# EAGLE board medi_dense_11_cpx (EAGLE 6.0)

Size 72.64 x 66.04 mm. Coordinates in mm from the lower left corner, seen from the top.
Outline: 0,0 0,66.04 72.64,66.04 72.64,0 0,0
Copper layers (1*16): Top 0.035mm / dielectric 1.5mm / Bottom 0.035mm
Design rules: minimum track width 10mil, minimum drill 24mil, track to track 8mil, track to pad 8mil, pad to pad 8mil, via to via 8mil, smd to smd 8mil, copper to edge 40mil, drill to drill 8mil, minimum pad ring 10mil, minimum via ring 8mil, stop-mask expansion 4mil, vias tented up to drill 0mil, thermal gap 10mil
Holes 3.2 mm at 6.6,6.6 6.6,59.44 66.04,6.6 66.04,59.44

## Footprints (pad centres in the part's own frame; a part is rotated, then mirrored left to right if it is on the bottom)
LED5MM = drill 0.813 octagon: A -1.27,0; K 1.27,0
1X01 = drill 1.016 octagon: 1 0,0

## Placement (x,y rotation side)
00  [LED5MM]  3.3,3.3 0 top
0A  [LED5MM]  69.34,3.3 0 top
01  [LED5MM]  9.91,3.3 0 top
1A  [LED5MM]  69.34,9.91 0 top
02  [LED5MM]  16.51,3.3 0 top
2A  [LED5MM]  69.34,16.51 0 top
03  [LED5MM]  23.11,3.3 0 top
3A  [LED5MM]  69.34,23.11 0 top
04  [LED5MM]  29.72,3.3 0 top
4A  [LED5MM]  69.34,29.72 0 top
05  [LED5MM]  36.32,3.3 0 top
5A  [LED5MM]  69.34,36.32 0 top
06  [LED5MM]  42.93,3.3 0 top
6A  [LED5MM]  69.34,42.93 0 top
07  [LED5MM]  49.53,3.3 0 top
7A  [LED5MM]  69.34,49.53 0 top
08  [LED5MM]  56.13,3.3 0 top
8A  [LED5MM]  69.34,56.13 0 top
09  [LED5MM]  62.74,3.3 0 top
9A  [LED5MM]  69.34,62.74 0 top
10  [LED5MM]  3.3,9.91 0 top
11  [LED5MM]  9.91,9.91 0 top
12  [LED5MM]  16.51,9.91 0 top
13  [LED5MM]  23.11,9.91 0 top
14  [LED5MM]  29.72,9.91 0 top
15  [LED5MM]  36.32,9.91 0 top
16  [LED5MM]  42.93,9.91 0 top
17  [LED5MM]  49.53,9.91 0 top
18  [LED5MM]  56.13,9.91 0 top
19  [LED5MM]  62.74,9.91 0 top
20  [LED5MM]  3.3,16.51 0 top
21  [LED5MM]  9.91,16.51 0 top
22  [LED5MM]  16.51,16.51 0 top
23  [LED5MM]  23.11,16.51 0 top
24  [LED5MM]  29.72,16.51 0 top
25  [LED5MM]  36.32,16.51 0 top
26  [LED5MM]  42.93,16.51 0 top
27  [LED5MM]  49.53,16.51 0 top
28  [LED5MM]  56.13,16.51 0 top
29  [LED5MM]  62.74,16.51 0 top
30  [LED5MM]  3.3,23.11 0 top
31  [LED5MM]  9.91,23.11 0 top
32  [LED5MM]  16.51,23.11 0 top
33  [LED5MM]  23.11,23.11 0 top
34  [LED5MM]  29.72,23.11 0 top
35  [LED5MM]  36.32,23.11 0 top
36  [LED5MM]  42.93,23.11 0 top
37  [LED5MM]  49.53,23.11 0 top
38  [LED5MM]  56.13,23.11 0 top
39  [LED5MM]  62.74,23.11 0 top
40  [LED5MM]  3.3,29.72 0 top
41  [LED5MM]  9.91,29.72 0 top
42  [LED5MM]  16.51,29.72 0 top
43  [LED5MM]  23.11,29.72 0 top
44  [LED5MM]  29.72,29.72 0 top
45  [LED5MM]  36.32,29.72 0 top
46  [LED5MM]  42.93,29.72 0 top
47  [LED5MM]  49.53,29.72 0 top
48  [LED5MM]  56.13,29.72 0 top
49  [LED5MM]  62.74,29.72 0 top
50  [LED5MM]  3.3,36.32 0 top
51  [LED5MM]  9.91,36.32 0 top
52  [LED5MM]  16.51,36.32 0 top
53  [LED5MM]  23.11,36.32 0 top
54  [LED5MM]  29.72,36.32 0 top
55  [LED5MM]  36.32,36.32 0 top
56  [LED5MM]  42.93,36.32 0 top
57  [LED5MM]  49.53,36.32 0 top
58  [LED5MM]  56.13,36.32 0 top
59  [LED5MM]  62.74,36.32 0 top
60  [LED5MM]  3.3,42.93 0 top
61  [LED5MM]  9.91,42.93 0 top
62  [LED5MM]  16.51,42.93 0 top
63  [LED5MM]  23.11,42.93 0 top
64  [LED5MM]  29.72,42.93 0 top
65  [LED5MM]  36.32,42.93 0 top
66  [LED5MM]  42.93,42.93 0 top
67  [LED5MM]  49.53,42.93 0 top
68  [LED5MM]  56.13,42.93 0 top
69  [LED5MM]  62.74,42.93 0 top
70  [LED5MM]  3.3,49.53 0 top
71  [LED5MM]  9.91,49.53 0 top
72  [LED5MM]  16.51,49.53 0 top
73  [LED5MM]  23.11,49.53 0 top
74  [LED5MM]  29.72,49.53 0 top
75  [LED5MM]  36.32,49.53 0 top
76  [LED5MM]  42.93,49.53 0 top
77  [LED5MM]  49.53,49.53 0 top
78  [LED5MM]  56.13,49.53 0 top
79  [LED5MM]  62.74,49.53 0 top
80  [LED5MM]  3.3,56.13 0 top
81  [LED5MM]  9.91,56.13 0 top
82  [LED5MM]  16.51,56.13 0 top
83  [LED5MM]  23.11,56.13 0 top
84  [LED5MM]  29.72,56.13 0 top
85  [LED5MM]  36.32,56.13 0 top
86  [LED5MM]  42.93,56.13 0 top
87  [LED5MM]  49.53,56.13 0 top
88  [LED5MM]  56.13,56.13 0 top
89  [LED5MM]  62.74,56.13 0 top
90  [LED5MM]  3.3,62.74 0 top
91  [LED5MM]  9.91,62.74 0 top
92  [LED5MM]  16.51,62.74 0 top
93  [LED5MM]  23.11,62.74 0 top
94  [LED5MM]  29.72,62.74 0 top
95  [LED5MM]  36.32,62.74 0 top
96  [LED5MM]  42.93,62.74 0 top
97  [LED5MM]  49.53,62.74 0 top
98  [LED5MM]  56.13,62.74 0 top
99  [LED5MM]  62.74,62.74 0 top
H0  [1X01]  23.62,6.6 0 top
H1  [1X01]  26.16,6.6 0 top
H2  [1X01]  28.7,6.6 0 top
H3  [1X01]  31.24,6.6 0 top
H4  [1X01]  33.78,6.6 0 top
H5  [1X01]  36.32,6.6 0 top
H6  [1X01]  38.86,6.6 0 top
H7  [1X01]  41.4,6.6 0 top
H8  [1X01]  43.94,6.6 0 top
H9  [1X01]  46.48,6.6 0 top
H10  [1X01]  49.02,6.6 0 top

## Library data of the parts
00 0A 01 1A 02 2A 03 3A 04 4A 05 5A 06 6A 07 7A 08 8A 09 9A 10-99 = led
H0 H1-H10 = pinhead

## Nets
D: 00.A 0A.K 1A.K 2A.K 3A.K 4A.K 5A.K 6A.K 7A.K 8A.K 9A.K 11.A 22.A 33.A 44.A 55.A 66.A 77.A 88.A 99.A H10.1
S0: 00.K 0A.A 01.A 02.A 03.A 04.A 05.A 06.A 07.A 08.A 09.A 10.K 20.K 30.K 40.K 50.K 60.K 70.K 80.K 90.K H0.1
S1: 01.K 1A.A 10.A 11.K 12.A 13.A 14.A 15.A 16.A 17.A 18.A 19.A 21.K 31.K 41.K 51.K 61.K 71.K 81.K 91.K H1.1
S2: 02.K 2A.A 12.K 20.A 21.A 22.K 23.A 24.A 25.A 26.A 27.A 28.A 29.A 32.K 42.K 52.K 62.K 72.K 82.K 92.K H2.1
S3: 03.K 3A.A 13.K 23.K 30.A 31.A 32.A 33.K 34.A 35.A 36.A 37.A 38.A 39.A 43.K 53.K 63.K 73.K 83.K 93.K H3.1
S4: 04.K 4A.A 14.K 24.K 34.K 40.A 41.A 42.A 43.A 44.K 45.A 46.A 47.A 48.A 49.A 54.K 64.K 74.K 84.K 94.K H4.1
S5: 05.K 5A.A 15.K 25.K 35.K 45.K 50.A 51.A 52.A 53.A 54.A 55.K 56.A 57.A 58.A 59.A 65.K 75.K 85.K 95.K H5.1
S6: 06.K 6A.A 16.K 26.K 36.K 46.K 56.K 60.A 61.A 62.A 63.A 64.A 65.A 66.K 67.A 68.A 69.A 76.K 86.K 96.K H6.1
S7: 07.K 7A.A 17.K 27.K 37.K 47.K 57.K 67.K 70.A 71.A 72.A 73.A 74.A 75.A 76.A 77.K 78.A 79.A 87.K 97.K H7.1
S8: 08.K 8A.A 18.K 28.K 38.K 48.K 58.K 68.K 78.K 80.A 81.A 82.A 83.A 84.A 85.A 86.A 87.A 88.K 89.A 98.K H8.1
S9: 09.K 9A.A 19.K 29.K 39.K 49.K 59.K 69.K 79.K 89.K 90.A 91.A 92.A 93.A 94.A 95.A 96.A 97.A 98.A 99.K H9.1

## Tracks (layer width: path | path; a pad name or v marks a point on that pad's centre or on a via)
D  (20 unrouted)
S0  (20 unrouted)
S1  (20 unrouted)
S2  (20 unrouted)
S3  (20 unrouted)
S4  (20 unrouted)
S5  (20 unrouted)
S6  (20 unrouted)
S7  (20 unrouted)
S8  (20 unrouted)
S9  (20 unrouted)